# EAGLE board SMAR IRRIGATION (EAGLE 7.7.0)
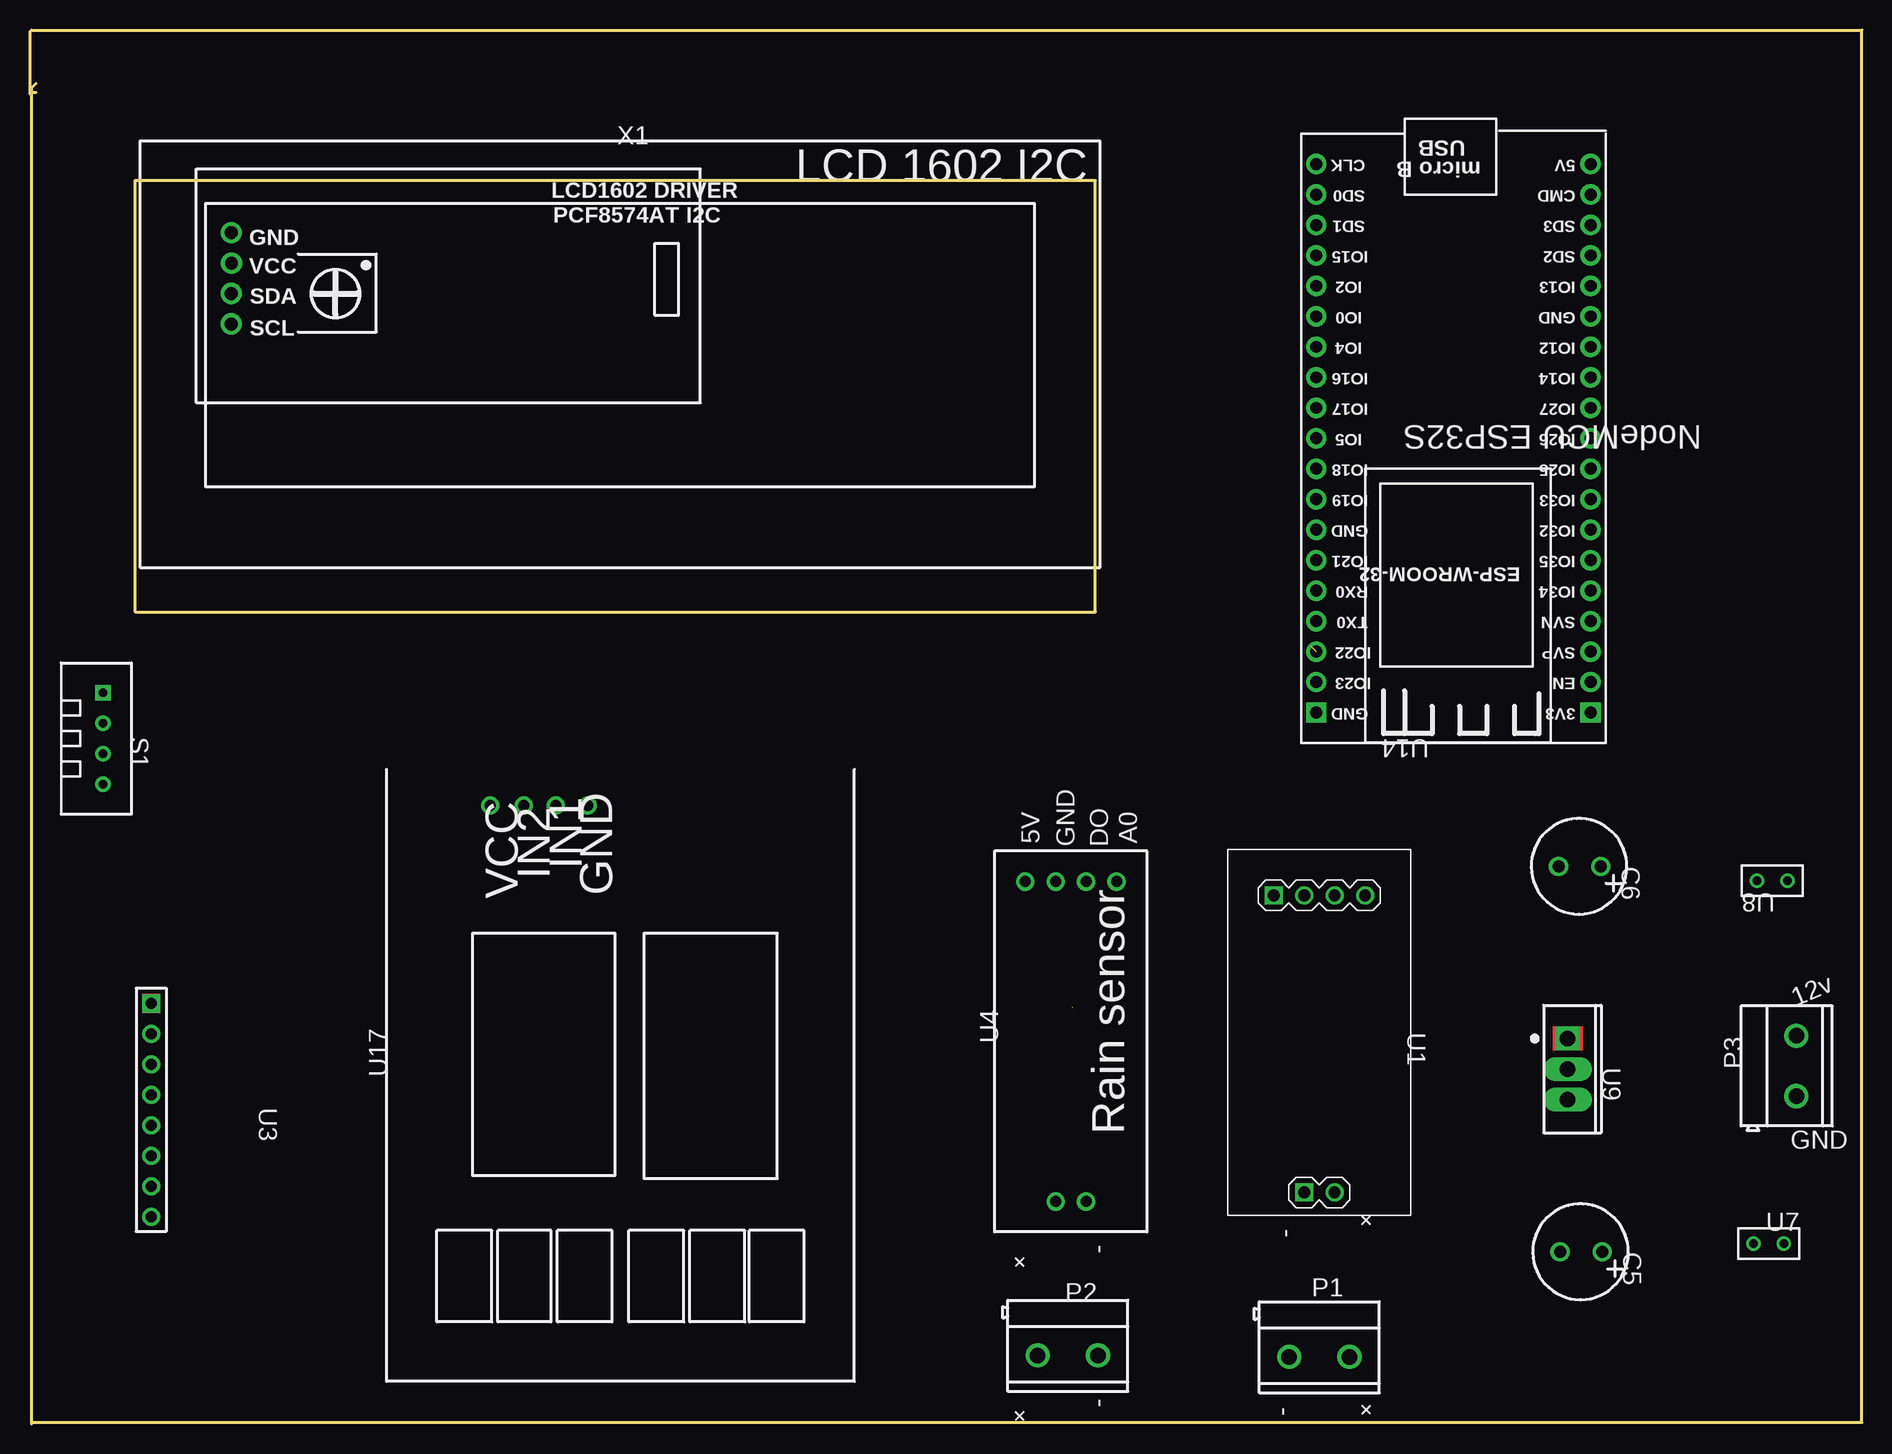
[diagram p0: board, top side]
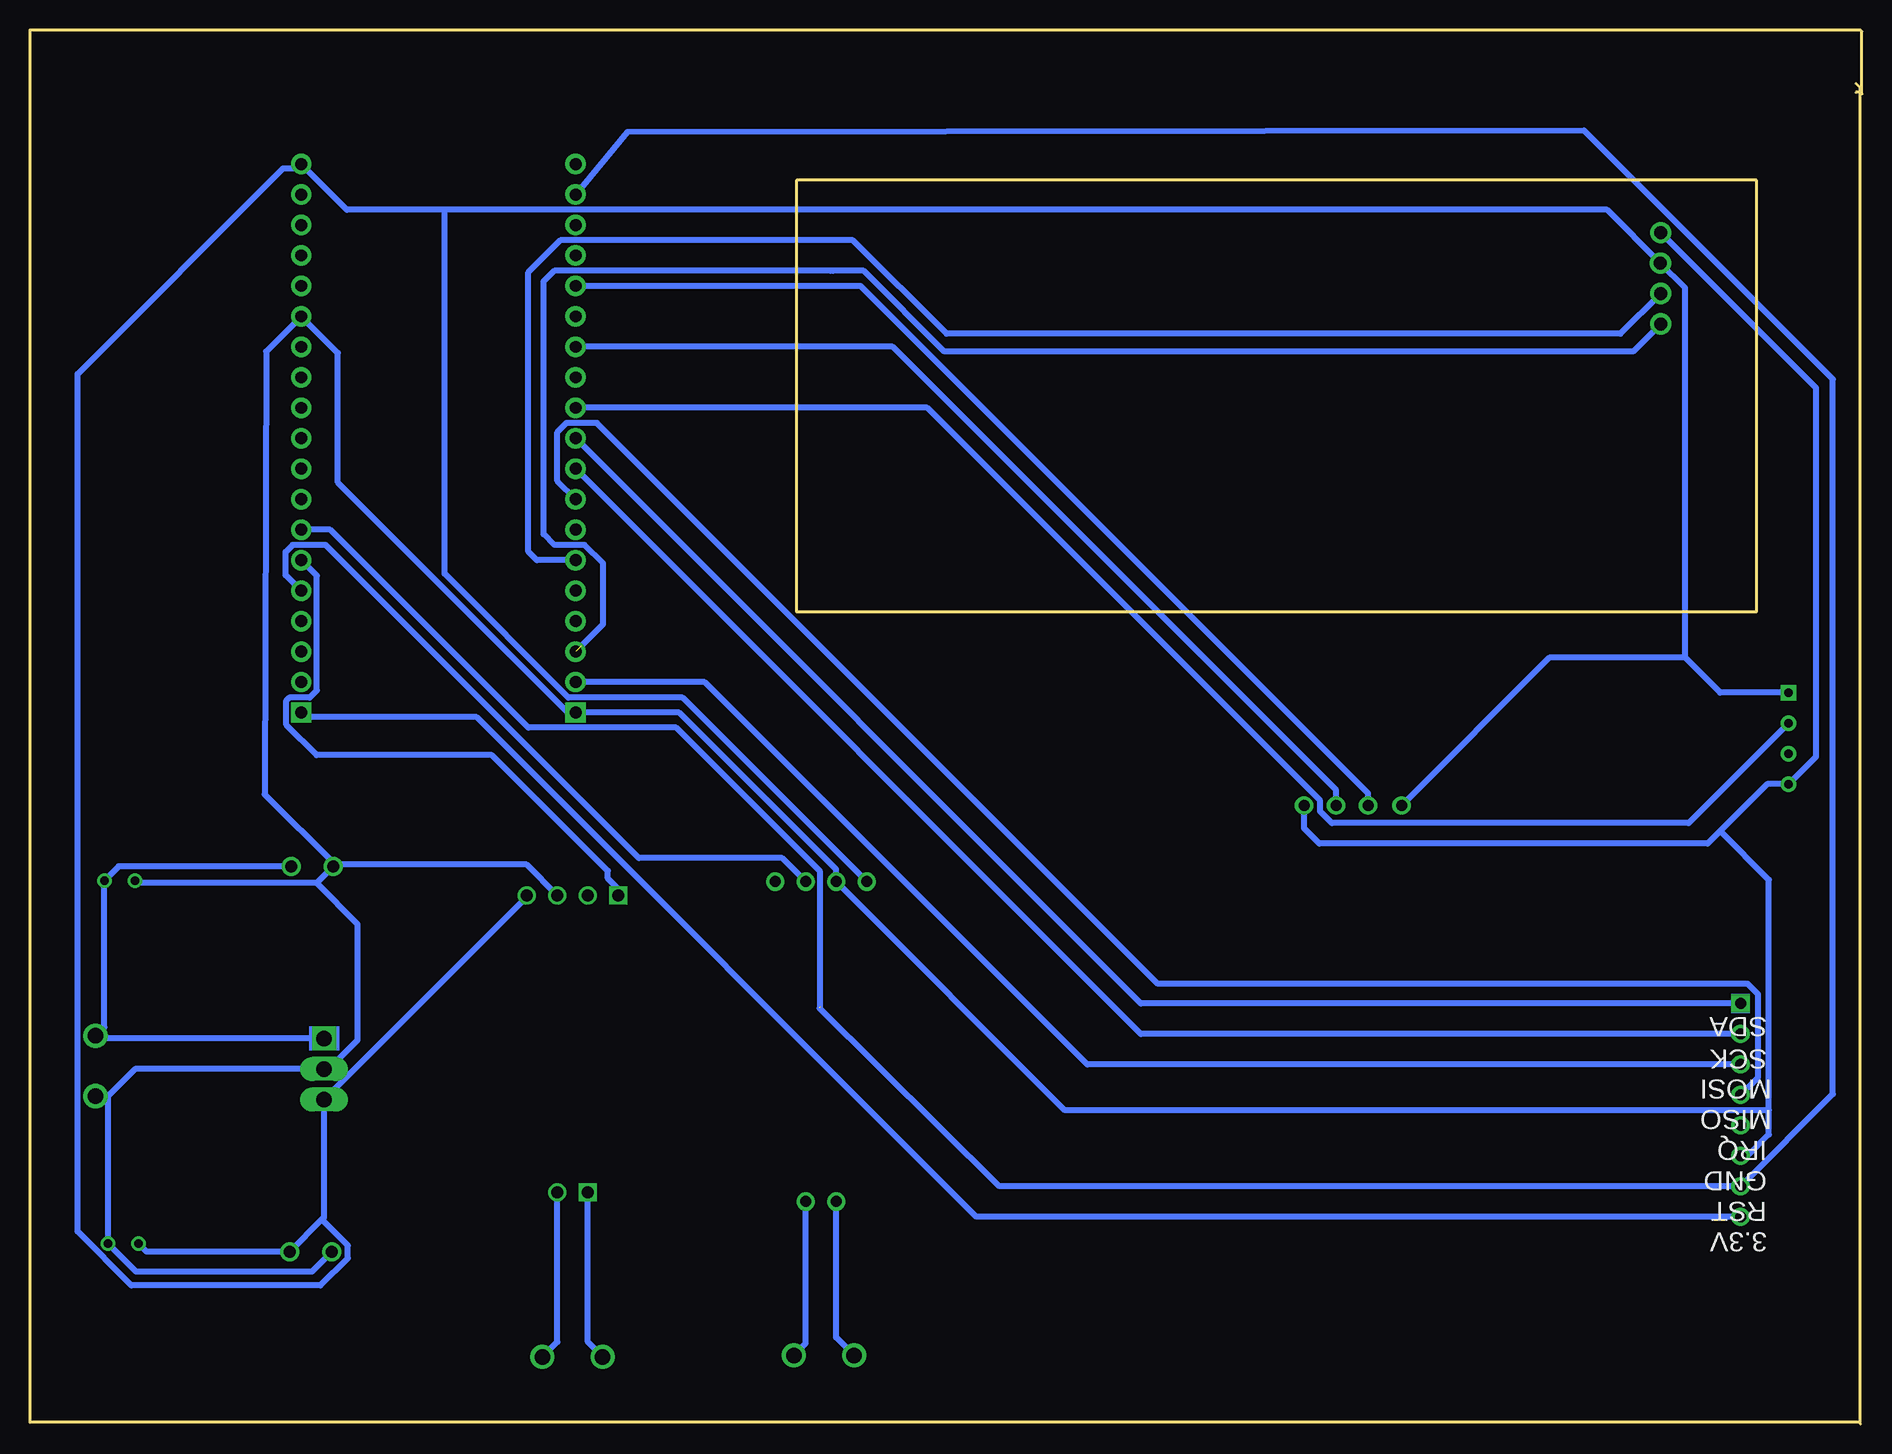
[diagram p1: board, bottom side, seen from below]

Size 152.65 x 116.2 mm. Coordinates in mm from the lower left corner, seen from the top.
Outline: 0.13,116.2 152.65,116.2 152.65,0.13 0.25,0.13
Outline: 0.13,0 0.13,111
Outline: 0.13,111 0.13,111.38
Outline: 0,110.87 0,116.08
Outline: 0.25,111.51 0.51,111.76
Outline: 0.13,111 0.51,111
Copper layers (1*16): Top 0.035mm / dielectric 1.5mm / Bottom 0.035mm
Design rules "PCB_SMART IRRGRATION_2023-07-21": minimum track width 6mil, minimum drill 0.35mm, track to track 6mil, track to pad 6mil, pad to pad 6mil, via to via 6mil, smd to smd 6mil, copper to edge 40mil, drill to drill 6mil, minimum pad ring 0mil, minimum via ring 0mil, stop-mask expansion 4mil, vias tented up to drill 0mil, thermal gap 10mil

## Footprints (pad centres in the part's own frame; a part is rotated, then mirrored left to right if it is on the bottom)
CAP-D8.0XF3.5_1PRIMARY = drill 0.991 pad 1.6: 1 0,3.505; 2 0,0
P:EX80Y80D801 = drill 2.032 pad 2.032: 1 0,0
CONN-TH_2P-P5.00_1PRIMARY = drill 1.295 pad 2.007: 1 -2.515,0; 2 2.515,0
SENSOR-TH_DHT11-1_1PRIMARY = drill 0.711 pad 1.295 square: 1 -3.81,0 | drill 0.711 pad 1.295: 2 -1.27,0; 3 1.27,0; 4 3.81,0
SOIL-MOISTURE-SENSOR_1PRIMARY = drill 0.991 pad 1.499 square: 1 -11.43,-3.81; 5 13.335,-1.27 | drill 0.991 pad 1.499: 2 -11.43,-1.27; 3 -11.43,1.27; 4 -11.43,3.81; 6 13.335,1.27 | drill 3.2 pad 3.2: 7 -6.35,0
RFID-RC522_1PRIMARY = drill 0.914 pad 1.524 square: 1 1.27,1.219 | drill 0.914 pad 1.524: 2 3.81,1.219; 3 6.35,1.219; 4 8.89,1.219; 5 11.43,1.219; 6 13.97,1.219; 7 16.51,1.219; 8 19.05,1.219
RAIN_SENSOR_1PRIMARY = drill 0.914 pad 1.524: 1 13.335,-3.81; 2 13.335,-1.27; 3 13.335,1.27; 4 13.335,3.81; 5 -13.335,1.27; 6 -13.335,-1.27
RAD-0.1_1PRIMARY = drill 0.711 pad 1.194: 1 -1.041,0.178; 2 1.499,0.178
TO-220IS_L10.16-W4.7-P2.54-L_1PRIMARY = drill 1.295 pad 2.007 square: 1 -2.54,0 | drill 1.295 pad 2.007 long: 2 0,0; 3 2.54,0
NODEMCU-ESP32S-CORRECT3_1PRIMARY = drill 0.991 pad 1.702 square: 1 0,0; 38 22.86,0 | drill 0.991 pad 1.702: 2 0,-2.54; 3 0,-5.08; 4 0,-7.62; 5 0,-10.16; 6 0,-12.7; 7 0,-15.24; 8 0,-17.78; 9 0,-20.32; 10 0,-22.86; 11 0,-25.4; 12 0,-27.94; 13 0,-30.48; 14 0,-33.02; 15 0,-35.56; 16 0,-38.1; 17 0,-40.64; 18 0,-43.18; 19 0,-45.72; 20 22.86,-45.72; 21 22.86,-43.18; 22 22.86,-40.64; 23 22.86,-38.1; 24 22.86,-35.56; 25 22.86,-33.02; 26 22.86,-30.48; 27 22.86,-27.94; 28 22.86,-25.4; 29 22.86,-22.86; 30 22.86,-20.32; 31 22.86,-17.78; 32 22.86,-15.24; 33 22.86,-12.7; 34 22.86,-10.16; 35 22.86,-7.62; 36 22.86,-5.08; 37 22.86,-2.54
2_CHANNEL_RELAY_MODULE_1PRIMARY = drill 0.914 pad 1.524: 1 48.006,30.353; 2 48.006,27.559; 3 48.006,24.892; 4 48.006,22.225 | drill 2.007 pad 2.007: 5 2.997,35.992; 6 48.006,35.992; 7 48.006,2.997; 8 2.997,2.997
I2C_LCD1602_I2C_PCF8574AT_1PRIMARY = drill 1.067 pad 1.778: 1 0,7.62; 2 0.025,5.08; 3 0,2.54; 4 0,0 | drill 2.997 pad 2.997: 5 69.825,13.005; 6 69.825,-17.729; 7 -5.055,-17.729; 8 -5.055,13.005 | drill 5.029 pad 5.029: 9 8.687,2.54

## Placement (x,y rotation side)
C5  CAP-D8.0XF3.5  [CAP-D8.0XF3.5_1PRIMARY]  127.51,14.35 270 top
C6  CAP-D8.0XF3.5  [CAP-D8.0XF3.5_1PRIMARY]  127.38,46.48 270 top
DUMMY1  [P:EX80Y80D801]  146.69,111.76 0 top
DUMMY2  [P:EX80Y80D801]  148.97,4.06 0 top
DUMMY3  [P:EX80Y80D801]  3.43,3.3 0 top
DUMMY4  [P:EX80Y80D801]  4.45,112.01 0 top
P1  CONN-TH_2P-P5.00  [CONN-TH_2P-P5.00_1PRIMARY]  107.44,5.59 0 top
P2  CONN-TH_2P-P5.00  [CONN-TH_2P-P5.00_1PRIMARY]  86.49,5.72 0 top
P3  CONN-TH_2P-P5.00  [CONN-TH_2P-P5.00_1PRIMARY]  147.19,29.85 90 top
S1  DHT11_C87032  [SENSOR-TH_DHT11-1_1PRIMARY]  6.1,57.15 270 top
U1  SOIL-MOISTURE-SENSOR  [SOIL-MOISTURE-SENSOR_1PRIMARY]  107.44,32.64 270 top
U3  RFID-RC522  [RFID-RC522_1PRIMARY]  8.89,36.32 270 top
U4  RAIN_SENSOR_COPY  [RAIN_SENSOR_1PRIMARY]  86.74,31.88 90 top
U7  RAD-0.1  [RAD-0.1_1PRIMARY]  144.65,14.86 0 top
U8  RAD-0.1  [RAD-0.1_1PRIMARY]  145.41,45.47 180 top
U9  TO-220IS_L10.16-W4.7-P2.54-L  [TO-220IS_L10.16-W4.7-P2.54-L_1PRIMARY]  128.14,29.59 270 top
U14  NODEMCU-ESP32S-CORRECT3  [NODEMCU-ESP32S-CORRECT3_1PRIMARY]  130.05,59.31 180 top
U17  2_CHANNEL_RELAY_MODULE  [2_CHANNEL_RELAY_MODULE_1PRIMARY]  68.71,3.56 90 top
X1  SCREEN_LCD_HD44780LCD_WITH_I2C_MODULE  [I2C_LCD1602_I2C_PCF8574AT_1PRIMARY]  16.76,91.69 0 top

## Library data of the parts
C5 C6 DUMMY1-DUMMY4 P1-P3 S1 U1 U3 U4 U7-U9 U14 U17 X1 = PCB_SMART IRRGRATION_2023-07-21

## Nets
3V3: U3.8 U14.1
5V: C5.1 S1.1 U1.4 U4.4 U7.1 U9.3 U14.19 U17.1 X1.2
12V: C6.1 P3.2 U8.1 U9.1
A: P1.2 U1.6
AO: U1.1 U14.6
B: P1.1 U1.5
DHT: S1.2 U14.28
GND: C5.2 C6.2 P3.1 S1.4 U1.3 U3.6 U4.3 U7.2 U8.2 U9.2 U14.14 U14.38 U17.4 X1.1
MISO: U3.4 U14.31
MOSI: U3.3 U14.37
NULL: U14.18
R1: U14.26 U17.3
R2: U14.24 U17.2
RAIN: U4.2 U14.5
RST: U3.7 U14.7 U14.21
S1_3: S1.3
SCK: U3.2 U14.30
SCL: U14.36 X1.4
SDA: U14.33 X1.3
SDA_R: U3.1 U14.29
U1_J1.2: U1.2
U4_1: U4.1
U4_5: P2.1 U4.5
U4_6: P2.2 U4.6

## Tracks (layer width: path | path; a pad name or v marks a point on that pad's centre or on a via)
3V3
  Bottom 0.5: U3.8 73.79,17.27 115.44,58.93 130.05,58.93 U14.1
5V
  Bottom 0.5: 118.11,101.22 21.23,101.22 X1.2 14.73,94.72 14.73,63.88 | 118.11,101.22 126.24,101.22 129.67,104.65 | U7.1 142.93,14.35 C5.1 128.32,17.04 | 128.32,17.04 128.14,17.22 U9.3 111.25,43.94 U1.4 | 129.67,104.65 U14.19 | U17.1 26.04,63.88 14.73,63.88 | 14.73,63.88 11.81,60.96 S1.1 | 129.67,104.65 131.57,104.65 148.69,87.53 148.69,16.05 144.2,11.56 128.45,11.56 126.16,13.82 126.16,14.88 128.32,17.04 | 118.11,101.22 118.11,70.89 107.8,60.55 98.27,60.55 U4.4
12V
  Bottom 0.5: C6.1 145.26,46.48 U8.1 146.46,33.1 P3.2 146.96,32.13 U9.1
A
  Bottom 0.5: U1.6 108.71,6.83 P1.2
AO
  Bottom 0.5: U14.6 128.75,70.71 128.75,61.16 129.36,60.55 131.06,60.55 131.29,60.33 131.29,58.27 128.78,55.75 114.17,55.75 104.5,46.1 104.5,45.47 103.63,44.6 U1.1
B
  Bottom 0.5: U1.5 106.17,6.83 P1.1
DHT
  Bottom 0.5: S1.2 14.43,50.09 44.17,50.09 45.14,51.08 45.14,51.97 77.9,84.71 U14.28
GND
  Bottom 0.5: U3.6 9.53,22.35 7.75,24.13 7.75,26.16 | U17.4 46.48,49.66 45.21,48.39 12.85,48.39 11.81,49.43 | 146.15,27.33 P3.1 | 146.15,27.33 U7.2 143.81,12.7 129.16,12.7 C5.2 | 128.78,45.09 C6.2 127.23,46.63 | 128.78,45.09 143.71,45.09 U8.2 | U1.3 111.28,46.63 127.23,46.63 | 7.75,26.16 66.42,26.16 U4.3 85.47,46.23 98.55,59.31 U14.38 107.82,59.31 127,78.49 127,89.28 U14.14 132.97,89.41 133.1,52.48 127.23,46.63 | X1.1 3.81,86.36 3.81,55.63 S1.4 7.9,53.34 11.81,49.43 | 146.15,27.33 143.89,29.59 U9.2 127.76,29.59 125.35,32 125.35,41.66 128.78,45.09 | 7.75,26.16 7.75,45.36 11.81,49.43
MISO
  Bottom 0.5: U3.4 8.64,28.91 8.64,35.81 9.53,36.7 58.67,36.7 105.41,83.44 107.95,83.44 108.71,82.68 108.71,78.61 U14.31
MOSI
  Bottom 0.5: U3.3 64.54,29.97 96.44,61.85 U14.37
R1
  Bottom 0.5: U17.3 43.82,52.83 80.77,89.79 U14.26
R2
  Bottom 0.5: U17.2 41.15,52.58 83.44,94.87 U14.24
RAIN
  Bottom 0.5: U14.5 131.34,70.76 131.34,72.69 130.76,73.28 128.02,73.28 101.91,47.17 89.97,47.17 U4.2
RST  (1 unrouted)
  Bottom 0.5: U14.21 102.87,107.7 23.14,107.82 2.41,87.1 2.41,27.51 U3.7 71.88,19.81 86.87,34.67 | U14.7 127.63,74.55 111.12,58.04 98.81,58.04 86.82,46.05 86.82,34.75
SCK
  Bottom 0.5: U3.2 60.07,32.51 U14.30
SCL  (1 unrouted)
  Bottom 0.5: 106.73,64.85 104.9,66.68 104.9,71.75 106.43,73.28 108.97,73.28 109.85,74.17 109.85,95.25 108.97,96.14 85.95,96.14 85.72,96.14 83.19,96.14 76.45,89.41 19.05,89.41 X1.4
SDA
  Bottom 0.5: U14.33 110.41,72.01 111.12,72.72 111.12,96.01 108.46,98.68 84.07,98.68 76.28,90.88 20.12,90.88 X1.3
SDA_R
  Bottom 0.5: U3.1 60.07,35.05 U14.29
U4_5
  Bottom 0.5: U4.5 85.47,7.21 P2.1
U4_6
  Bottom 0.5: U4.6 88.01,6.71 P2.2

## Text on the board
tPlace: 5V | A0 | GND | DO | 12v | GND | - | + | + | - | + | - | - | +